# EAGLE board ESP8266 (EAGLE 7.7.0)
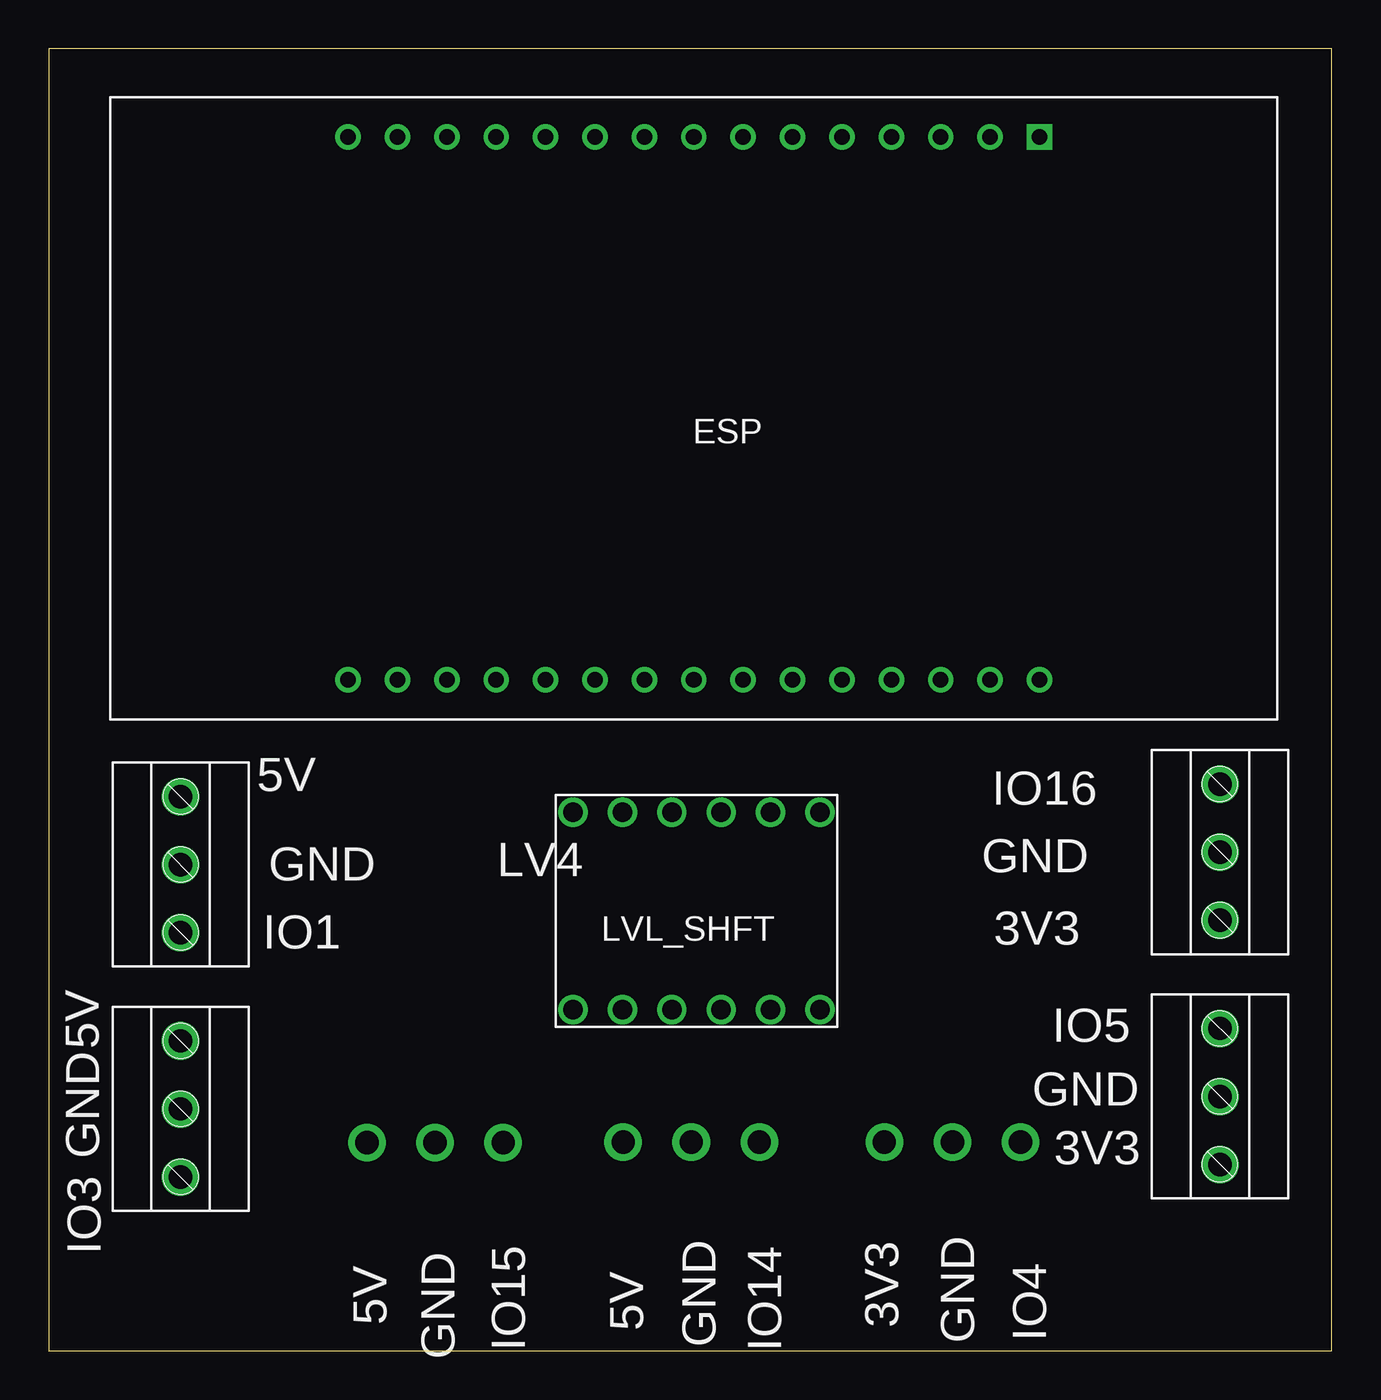
[diagram p0: board, top side]
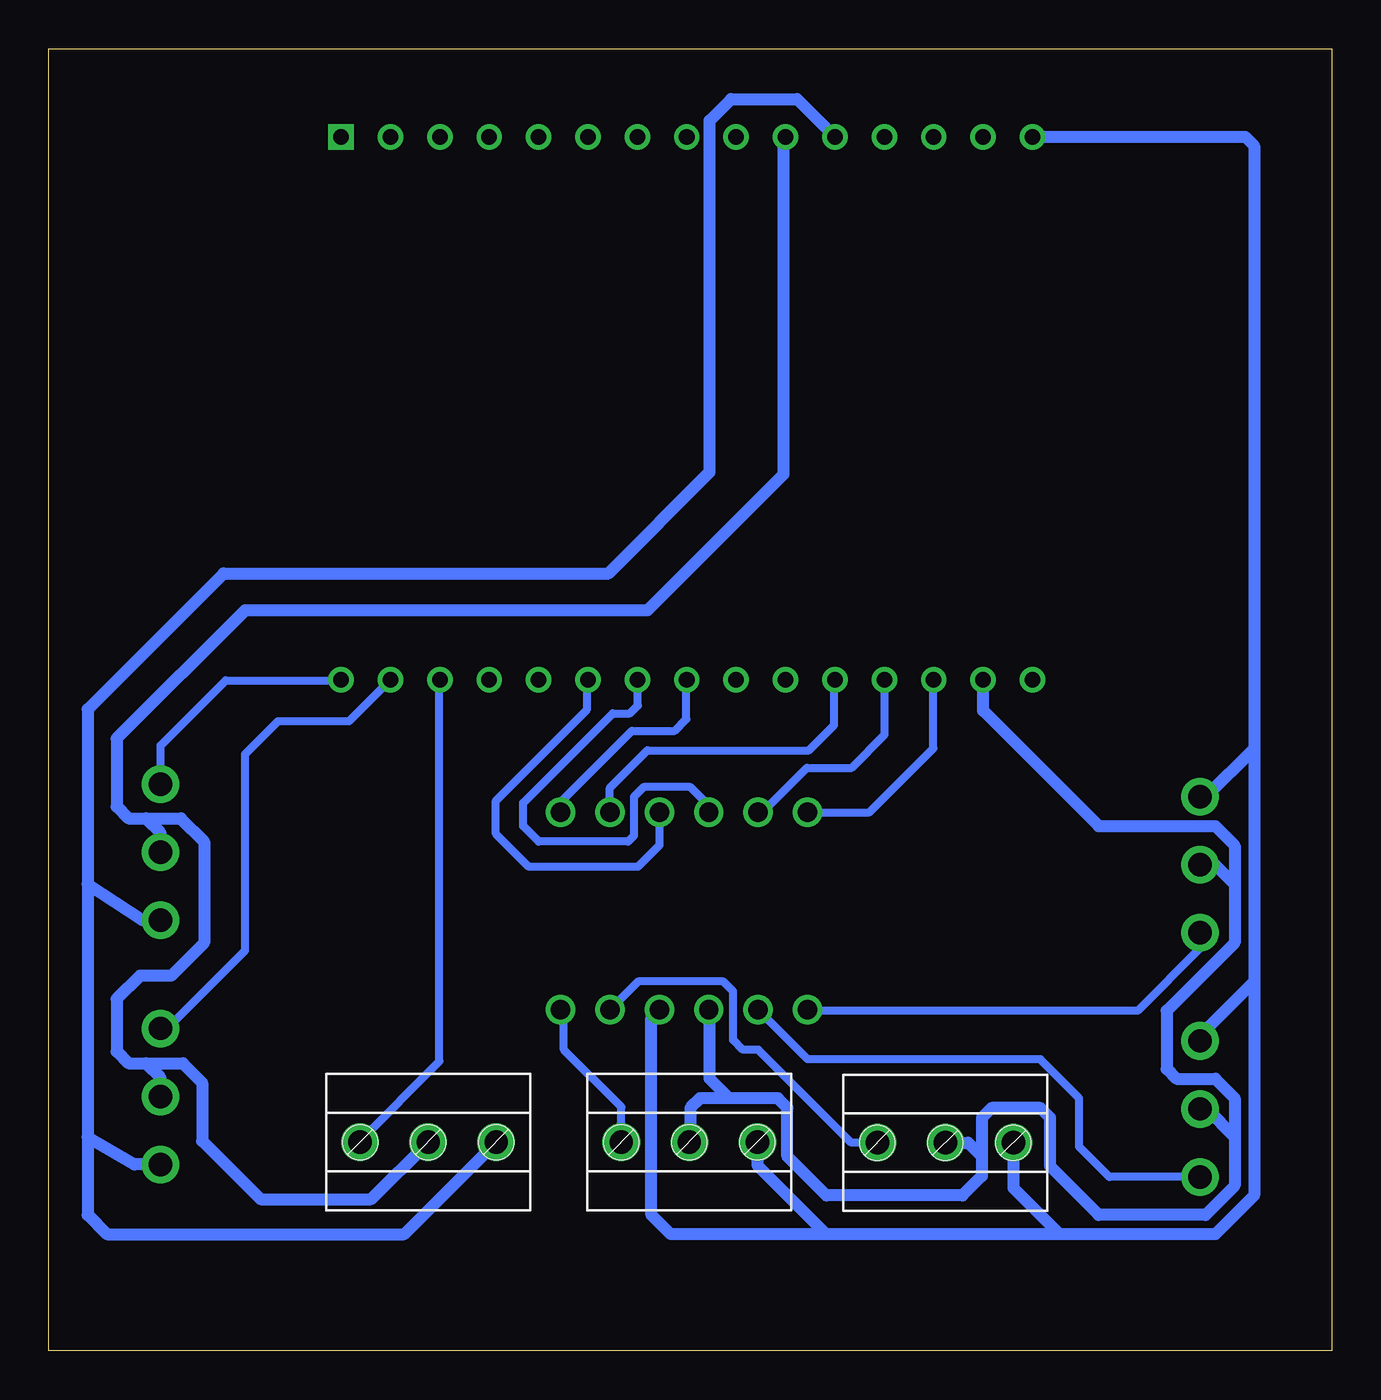
[diagram p1: board, bottom side, seen from below]

Size 66 x 67 mm. Coordinates in mm from the lower left corner, seen from the top.
Outline: 0,0 66,0 66,67 0,67 0,0
Copper layers (1*16): Top 0.035mm / dielectric 1.5mm / Bottom 0.035mm
Design rules "default": minimum track width 10mil, minimum drill 24mil, track to track 8mil, track to pad 8mil, pad to pad 8mil, via to via 8mil, smd to smd 8mil, copper to edge 40mil, drill to drill 8mil, minimum pad ring 10mil, minimum via ring 8mil, stop-mask expansion 4mil, vias tented up to drill 0mil, thermal gap 10mil

## Footprints (pad centres in the part's own frame; a part is rotated, then mirrored left to right if it is on the bottom)
ESP8266_NODEMCV2 = drill 0.8: 3,3V1 2.54,-13.97; 3,3V2 7.62,-13.97; 3,3V3 -5.08,13.97; 3,3V4 17.78,13.97; 5V 17.78,-13.97; D0 -17.78,13.97; D1 -15.24,13.97; D2 -12.7,13.97; D3 -10.16,13.97; D4 -7.62,13.97; D5 0,13.97; D6 2.54,13.97; D7 5.08,13.97; D8 7.62,13.97; D9 10.16,13.97; D10 12.7,13.97; EN 10.16,-13.97; GDN3 15.24,-13.97; GND 0,-13.97; GND2 5.08,-13.97; GND4 -2.54,13.97; GND5 15.24,13.97; RST 12.7,-13.97; RSV1 -15.24,-13.97; RSV2 -12.7,-13.97; RSV3 -10.16,-13.97; RSV4 -7.62,-13.97; RSV5 -5.08,-13.97; RSV6 -2.54,-13.97 | drill 0.8 square: A0 -17.78,-13.97
3,5MM_3PIN = drill 1.2 pad 1.93: 1 -3.5,2; 2 0,2; 3 3.5,2
LVL_SHIFTER_4CH = drill 1: GND1 1.27,5.08; GND2 1.27,-5.08; HV -1.27,5.08; HV1 -6.35,5.08; HV2 -3.81,5.08; HV3 3.81,5.08; HV4 6.35,5.08; LV -1.27,-5.08; LV1 -6.35,-5.08; LV2 -3.81,-5.08; LV3 3.81,-5.08; LV4 6.35,-5.08

## Placement (x,y rotation side)
ESP  ESP8266_NODEMCUV2  [ESP8266_NODEMCV2]  33.18,48.49 180 top
IC1  3,5MM_3PIN  [3,5MM_3PIN]  4.79,25.02 270 top
IC2  3,5MM_3PIN  [3,5MM_3PIN]  4.79,12.45 270 top
IC3  3,5MM_3PIN  [3,5MM_3PIN]  19.88,12.71 180 bottom
IC4  3,5MM_3PIN  [3,5MM_3PIN]  33.05,12.74 180 bottom
IC5  3,5MM_3PIN  [3,5MM_3PIN]  46.48,12.74 180 bottom
IC6  3,5MM_3PIN  [3,5MM_3PIN]  62.24,13.09 90 top
IC7  3,5MM_3PIN  [3,5MM_3PIN]  62.24,25.66 90 top
LVL_SHFT  LVL_SHIFTER_4CH  [LVL_SHIFTER_4CH]  33.32,22.63 180 top

## Library data of the parts
ESP = esp8266
IC1-IC7 = Screw_connector
LVL_SHFT = level_shifter_MOD12

## Nets
3.3V: ESP.3,3V2 IC5.1 IC6.1 IC7.1
5V: ESP.5V IC1.1 IC2.1 IC3.1 IC4.1 LVL_SHFT.HV
GND1: ESP.GND5 IC1.2 IC2.2 IC3.2 IC4.2 LVL_SHFT.GND1
GND2: ESP.GND2 IC5.2 IC6.2 IC7.2
N$1: IC4.3 LVL_SHFT.HV1
N$2: IC3.3 LVL_SHFT.HV2
N$3: IC2.3 LVL_SHFT.HV3
N$4: IC1.3 LVL_SHFT.HV4
N$5: ESP.D5 LVL_SHFT.LV1
N$6: ESP.D8 LVL_SHFT.LV2
N$7: ESP.D9 LVL_SHFT.LV3
N$8: ESP.D0 IC7.3
N$9: ESP.GND4 LVL_SHFT.GND2
N$10: ESP.D10 LVL_SHFT.LV4
N$11: ESP.3,3V3 LVL_SHFT.LV
N$12: ESP.D2 IC5.3
N$15: ESP.D1 IC6.3

## Tracks (layer width: path | path; a pad name or v marks a point on that pad's centre or on a via)
3.3V
  Bottom 0.61: 64,24 64,33 57,40 37.2,40 32,45.2 32,63.3 30.9,64.4 27.5,64.4 ESP.3,3V2 | 64,24 64,11 | 64,11 64,7 63,6 47.72,6 IC5.1 | IC6.1 61.59,9.59 64,11 | IC7.1 61.16,22.16 64,24
5V
  Bottom 0.61: ESP.5V 4.46,62.46 4,62 4,31 | 4,31 4,19 | 4,19 4,8 6,6 14,6 | 14,6 26,6 | 26,6 34,6 35,7 35,17.14 LVL_SHFT.HV | IC3.1 16.38,8.38 14,6 | IC2.1 6.79,16.21 4,19 | IC1.1 6.48,28.52 4,31 | IC4.1 29.55,9.55 26,6
GND1
  Bottom 0.406: 32,17.5 LVL_SHFT.GND1 | 33,10.79 IC4.2
  Bottom 0.61: 5,24 5,26 6,27 12,27 17.94,32.94 ESP.GND5 | 5,24 5,21 8.5,17.5 8.5,14.5 8,14 6,14 5,13 5,11 | 5,11 5,8.5 6.5,7 12,7 14.5,9.5 14.5,12 15,12.5 17.5,12.5 18,12 18,10 | 18,10 18,9 19,8 26,8 28,10 28,12.5 28.5,13 31,13 | 31,13 32,14 32,17.5 | 31,13 32.5,13 33,12.5 33,10.79 | IC3.2 18.71,10.71 18,10 | IC2.2 6.45,12.45 5,11 | IC1.2 6.02,25.02 5,24
GND2
  Bottom 0.406: 28.2,62.36 ESP.GND2
  Bottom 0.61: 61,27.4 61.9,27.4 62.5,28 62.5,31.5 55.9,38.1 35.2,38.1 28.2,45.1 28.2,62.36 | 61,27.4 59.2,27.4 58,26.2 58,21 59.7,19.3 61.3,19.3 62.5,18.1 62.5,15.4 61.9,14.8 61,14.8 | 61,14.8 59.1,14.8 58.1,13.8 58.1,10.8 55.1,7.8 49.42,7.8 IC5.2 | IC6.2 60.24,14.04 61,14.8 | IC7.2 60.24,26.64 61,27.4
N$1
  Bottom 0.406: IC4.3 36.55,12.55 39.5,15.5 39.5,17.38 LVL_SHFT.HV1
N$2
  Bottom 0.406: IC3.3 24.71,10.71 29.5,15.5 30.3,15.5 30.8,16 30.8,18.5 31.3,19 35.68,19 LVL_SHFT.HV2
N$3
  Bottom 0.406: IC2.3 11.45,8.95 13,10.5 13,13 15,15 26.96,15 LVL_SHFT.HV3
N$4
  Bottom 0.406: IC1.3 6.79,20.71 10,17.5 26.92,17.5 LVL_SHFT.HV4
N$5
  Bottom 0.406: LVL_SHFT.LV1 39.67,28.23 36,31.9 33.8,31.9 33.2,32.5 33.2,34.5 ESP.D5
N$6
  Bottom 0.406: LVL_SHFT.LV2 37.13,28.97 35.2,30.9 26.9,30.9 25.6,32.2 25.6,34.48 ESP.D8
N$7
  Bottom 0.406: LVL_SHFT.LV3 29.29,27.71 27,30 24.7,30 23,31.7 23,34.5 ESP.D9
N$8
  Bottom 0.406: IC7.3 60.24,31.16 56.9,34.5 50.98,34.5 ESP.D0
N$9
  Bottom 0.406: LVL_SHFT.GND2 32.05,28.05 33,29 35.4,29 35.9,28.5 35.9,26.5 36.2,26.2 40.8,26.2 41.6,27 41.6,28.2 37,32.8 36.1,32.8 35.7,33.2 35.7,34.5 ESP.GND4
N$10
  Bottom 0.406: LVL_SHFT.LV4 23.79,27.71 20.5,31 20.5,34.5 ESP.D10
N$11
  Bottom 0.406: LVL_SHFT.LV 34.59,26.01 35.7,24.9 41.3,24.9 43,26.6 43,28.3 38.3,33 38.3,34.48 ESP.3,3V3
N$12
  Bottom 0.406: IC5.3 49.98,10.82 45.9,14.9 45.9,34.5 ESP.D2
N$15
  Bottom 0.406: IC6.3 59.91,16.59 55.9,20.6 55.9,30.7 54.2,32.4 50.54,32.4 ESP.D1

## Text on the board
tNames: 5V | IO16 | LV4 | GND | GND | IO1 | 3V3 | 5V | IO5 | GND | GND | 3V3 | IO3 | GND | IO14 | 5V | 5V | 3V3 | IO15 | GND | GND | IO4